# Altium PCB PCB1.PcbDoc (part 3 of 3)
Units mm, origin at the board's own origin, x right, y up, seen from the top; angles counter-clockwise.
Board outline 44.56 x 41.5 mm, 2 copper layers (Top Layer, Bottom Layer), stack 0.235 mm thick; 45 components, 47 nets, 215 pads, 58 vias.
Unrouted connection lines stored in the file: 2.
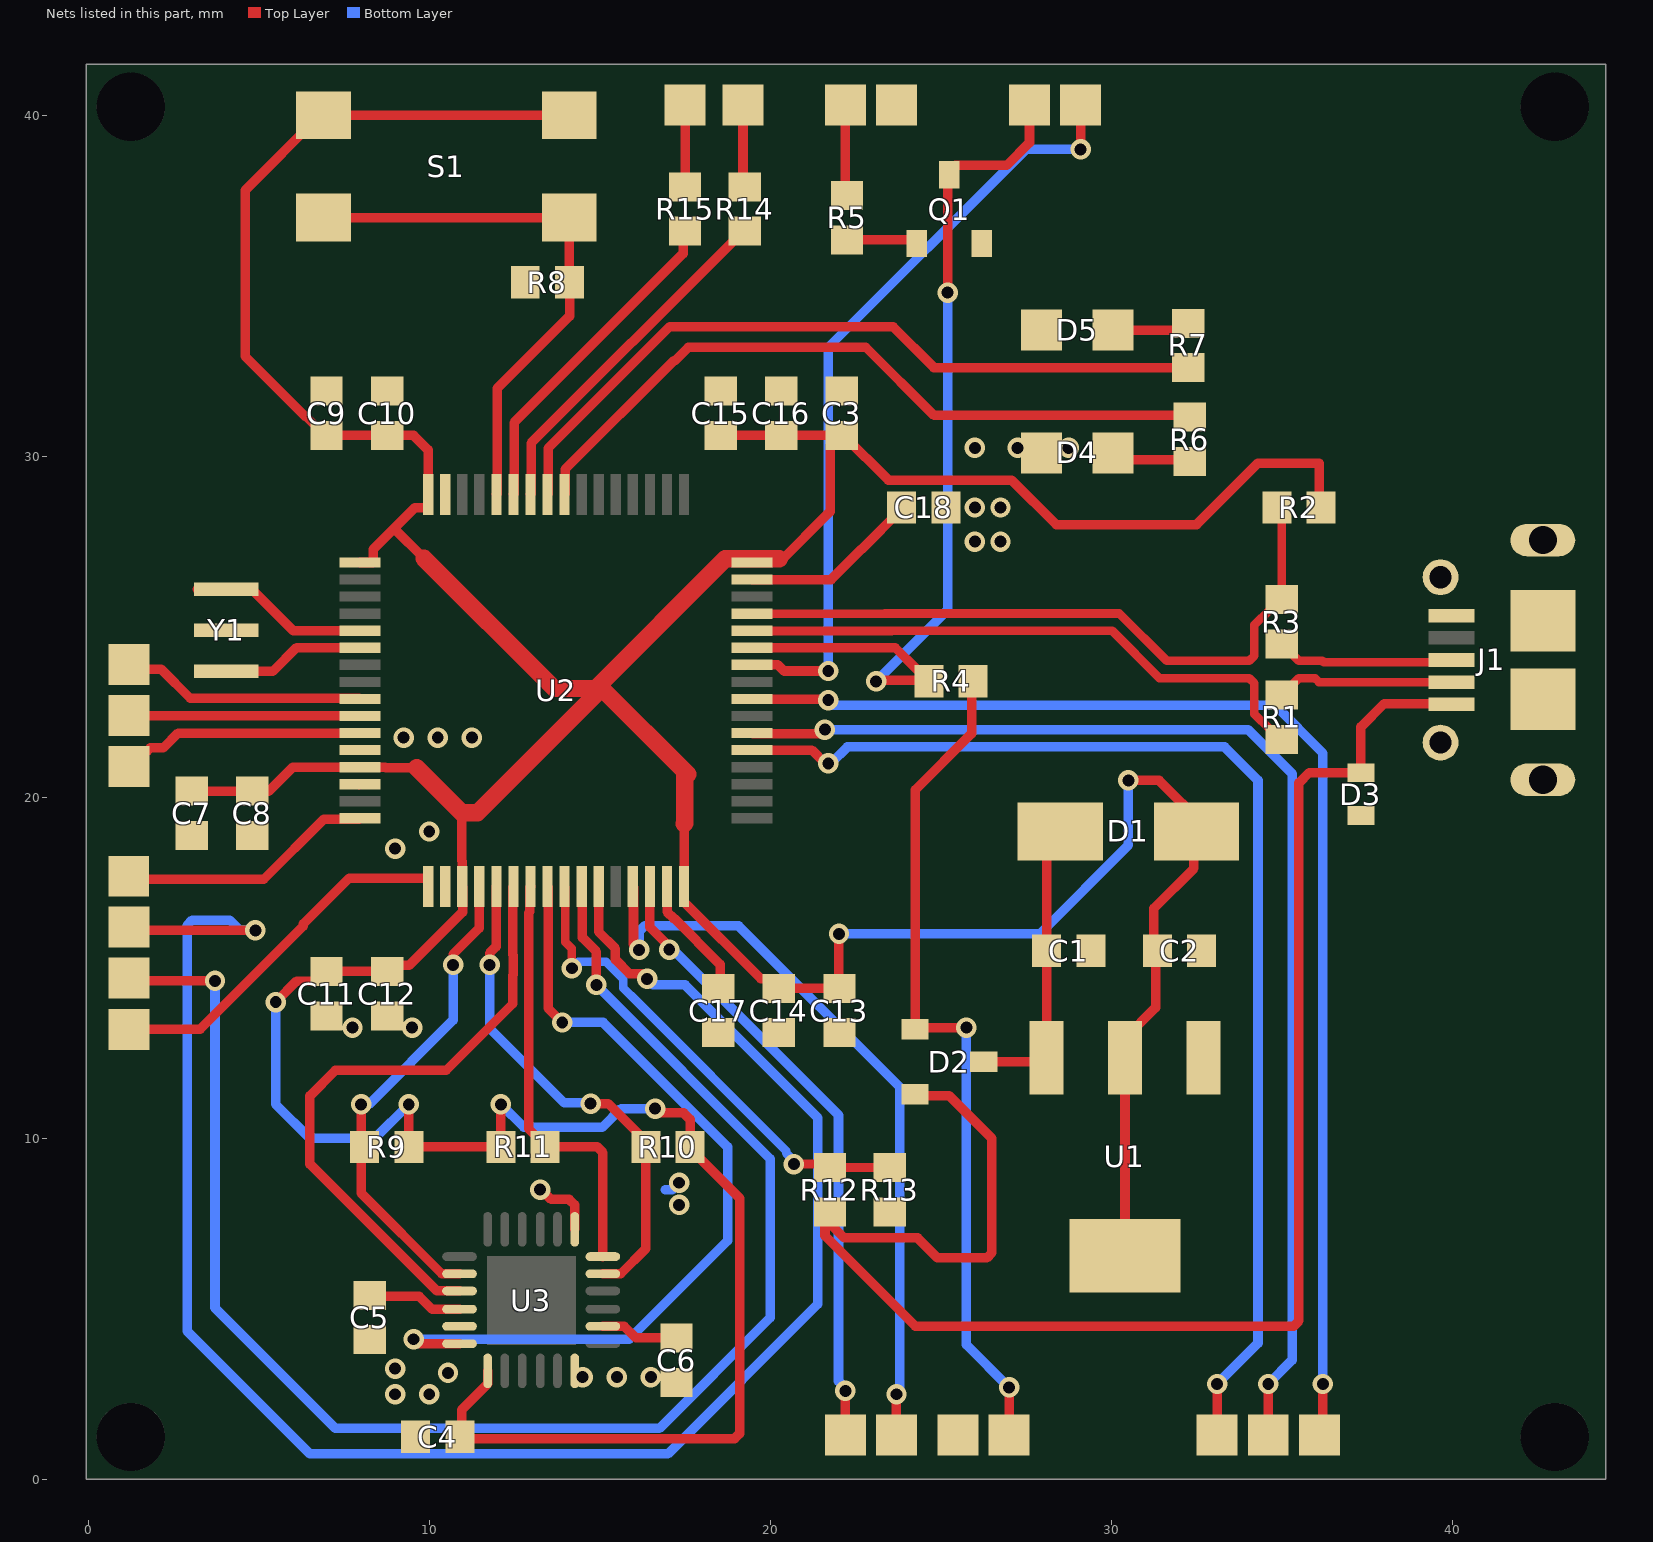
[diagram p2: the nets of this part, all layers, seen from the top]

## Via types
v1: diameter 0.6, hole 0.35, Top Layer to Bottom Layer, tented both sides, 34 vias
v2: diameter 0.6, hole 0.35, Top Layer to Bottom Layer, 24 vias

## Nets (pads, with @x,y where several pads share a name; then routed paths per layer and width w, separated by ;. In a path a pad name is that pad's centre, name@x,y a point inside that pad or via, vN(x,y) a via of type N, cw(c..) or ccw(c..) an arc to the next point about the centre after c; other vN are vias at no path point) (continued)
pads on no net: J1.4 U2.2 U2.3 U2.4 U2.7 U2.8 U2.15 U2.28 U2.33 U2.34 U2.35 U2.36 U2.39 U2.41 U2.46 U2.49 U2.50 U2.51 U2.52 U2.53 U2.54 U2.55 U2.61 U2.62 U3.2 U3.3 U3.4 U3.5 U3.6 U3.7 U3.14 U3.15 U3.16 U3.17 U3.19 U3.21 U3.22 U3.P$1

## Polygon pours and split planes (outlines as drawn)
GND on Bottom Layer "NONET_L01_P-001" (solid, remove dead copper, pour order 4): 12.76,8.951 12.5,8.691 12.5,8.25 13.046,7.704 17.454,7.704 17.75,8 17.75,9.119 17.5,9.25 17.381,9.27 17.191,9.241 16.7,8.75 13.5,8.75 13.25,9
GND on Bottom Layer "NONET_L01_P-001" (solid, remove dead copper, pour order 5): 8.346,3.48 8.512,3.646 16.604,3.646 17,3.25 17,2.391 16.73,2.12 8.38,2.12 8.25,2.25 8.25,3.25 8.5,3.5
GND on Bottom Layer "NONET_L01_P-001" (solid, remove dead copper, pour order 3): 8.5,22.5 11.25,22.5 11.75,22 11.75,18.5 11.25,18 8.25,18 8,18.25 8,22
GND on Bottom Layer "NONET_L01_P-001" (solid, pour order 1): 29.25,30.75 29.25,28 28.25,27 25.75,27 25.5,27.25 25.5,27.5 25.5,30.5 25.75,30.75
GND on Top Layer "GND" (solid, remove dead copper, pour order 7): 0,41.5 44.5,41.5 44.5,0 0,0

## Keep-outs
Keep-Out Layer:
  lines w0.1: -0.06,0 -0.06,41.5 44.5,41.5 44.5,0 6.5,0 -0.06,0

## Silkscreen, mask and mechanical layers (free items; w line width, h text height)
Top Overlay:
  text "SDA" at 17.2,41.105 h0.64
  text "SCL" at 18.8,41.105 h0.64
  text "SBUS" at 21.7,41.105 h0.64
  text "GND" at 23.3,41.104 h0.64
  text "RX1" at 27.2,41.101 h0.64
  text "TX1" at 28.7,41.101 h0.64
  text "MICRO USB" at 44.295,29.4 h0.64 r90
  text "VBAT" at 0.101,24.399 h0.64 r270
  text "RSII" at 0.105,22.8 h0.64 r270
  text "CURRENT" at 0.105,21.8 h0.64 r270
  text "S4" at 0.105,18 h0.64 r270
  text "S3" at 0.105,16.5 h0.64 r270
  text "S2" at 0.105,15 h0.64 r270
  text "S1" at 0.105,13.4 h0.64 r270
  text "MPU6000 - FLIGHT CONTROLLER" at 43.989,3.25 h1.4 r90
  text "RX_3" at 21.8,0.193 h0.64
  text "TX_3" at 23.2,0.193 h0.64
  text "GND" at 25.1,0.204 h0.64
  text "5V_IN" at 26.4,0.193 h0.64
  text "TX_6" at 32.6,0.193 h0.64
  text "RX_6" at 34.2,0.193 h0.64
  text "PPM_IN" at 35.6,0.193 h0.64

## Text inside footprints (layer, text, board x,y; h text height)
U3: Mechanical 13 "Z" at 12.41,5.37 h0.25 r270; Mechanical 13 "X" at 13.41,4.17 h0.25 r270; Mechanical 13 "Y" at 14.01,5.87 h0.25 r270